# Altium PCB demo.PcbDoc
Units mm, origin at the board's own origin, x right, y up, seen from the top; angles counter-clockwise.
Board outline 100 x 100 mm, 2 copper layers (Top Layer, Bottom Layer); 59 components, 69 nets, 272 pads, 0 vias.
Unrouted connection lines stored in the file: 188.
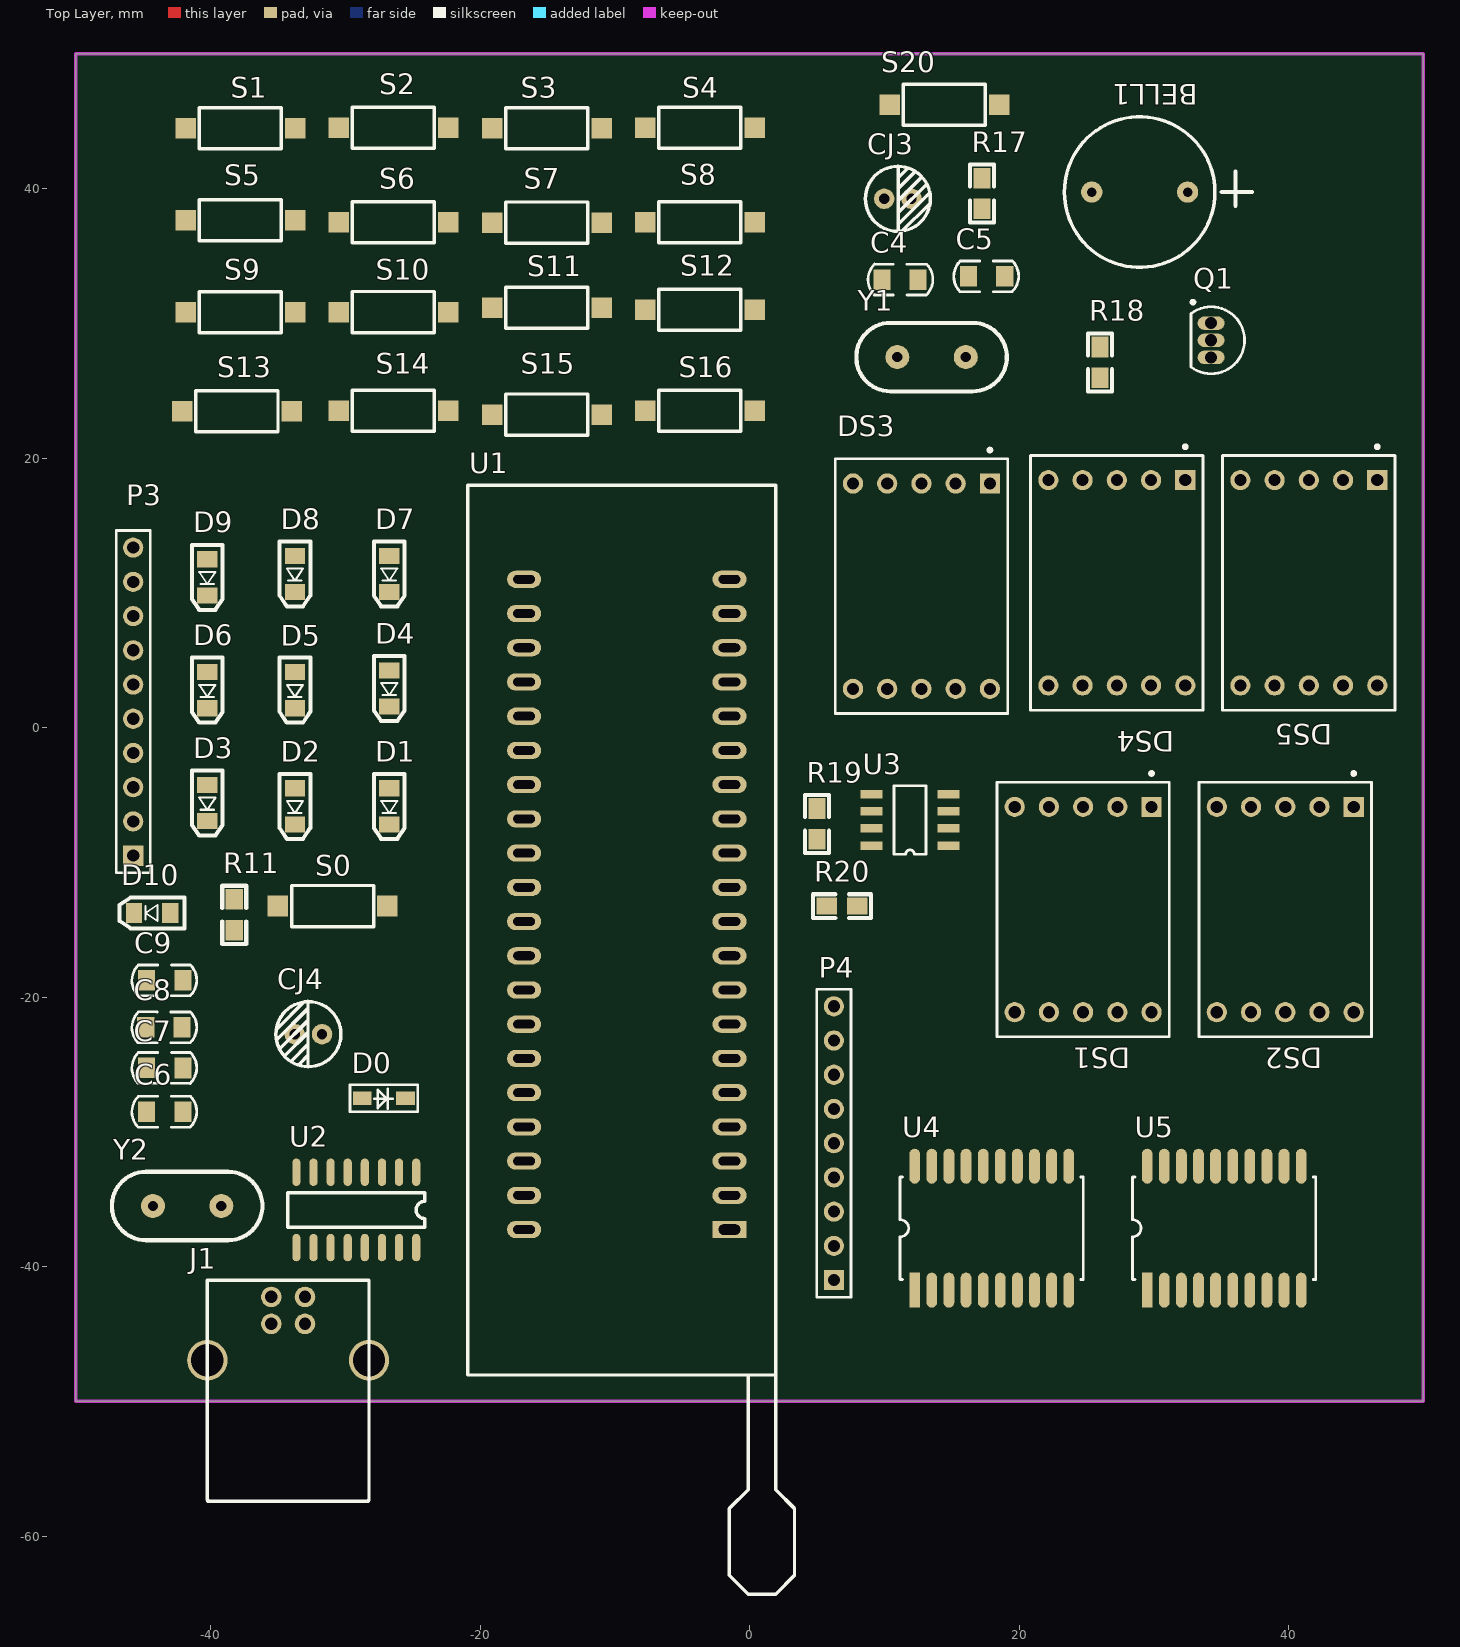
[diagram p0: Top Layer view]
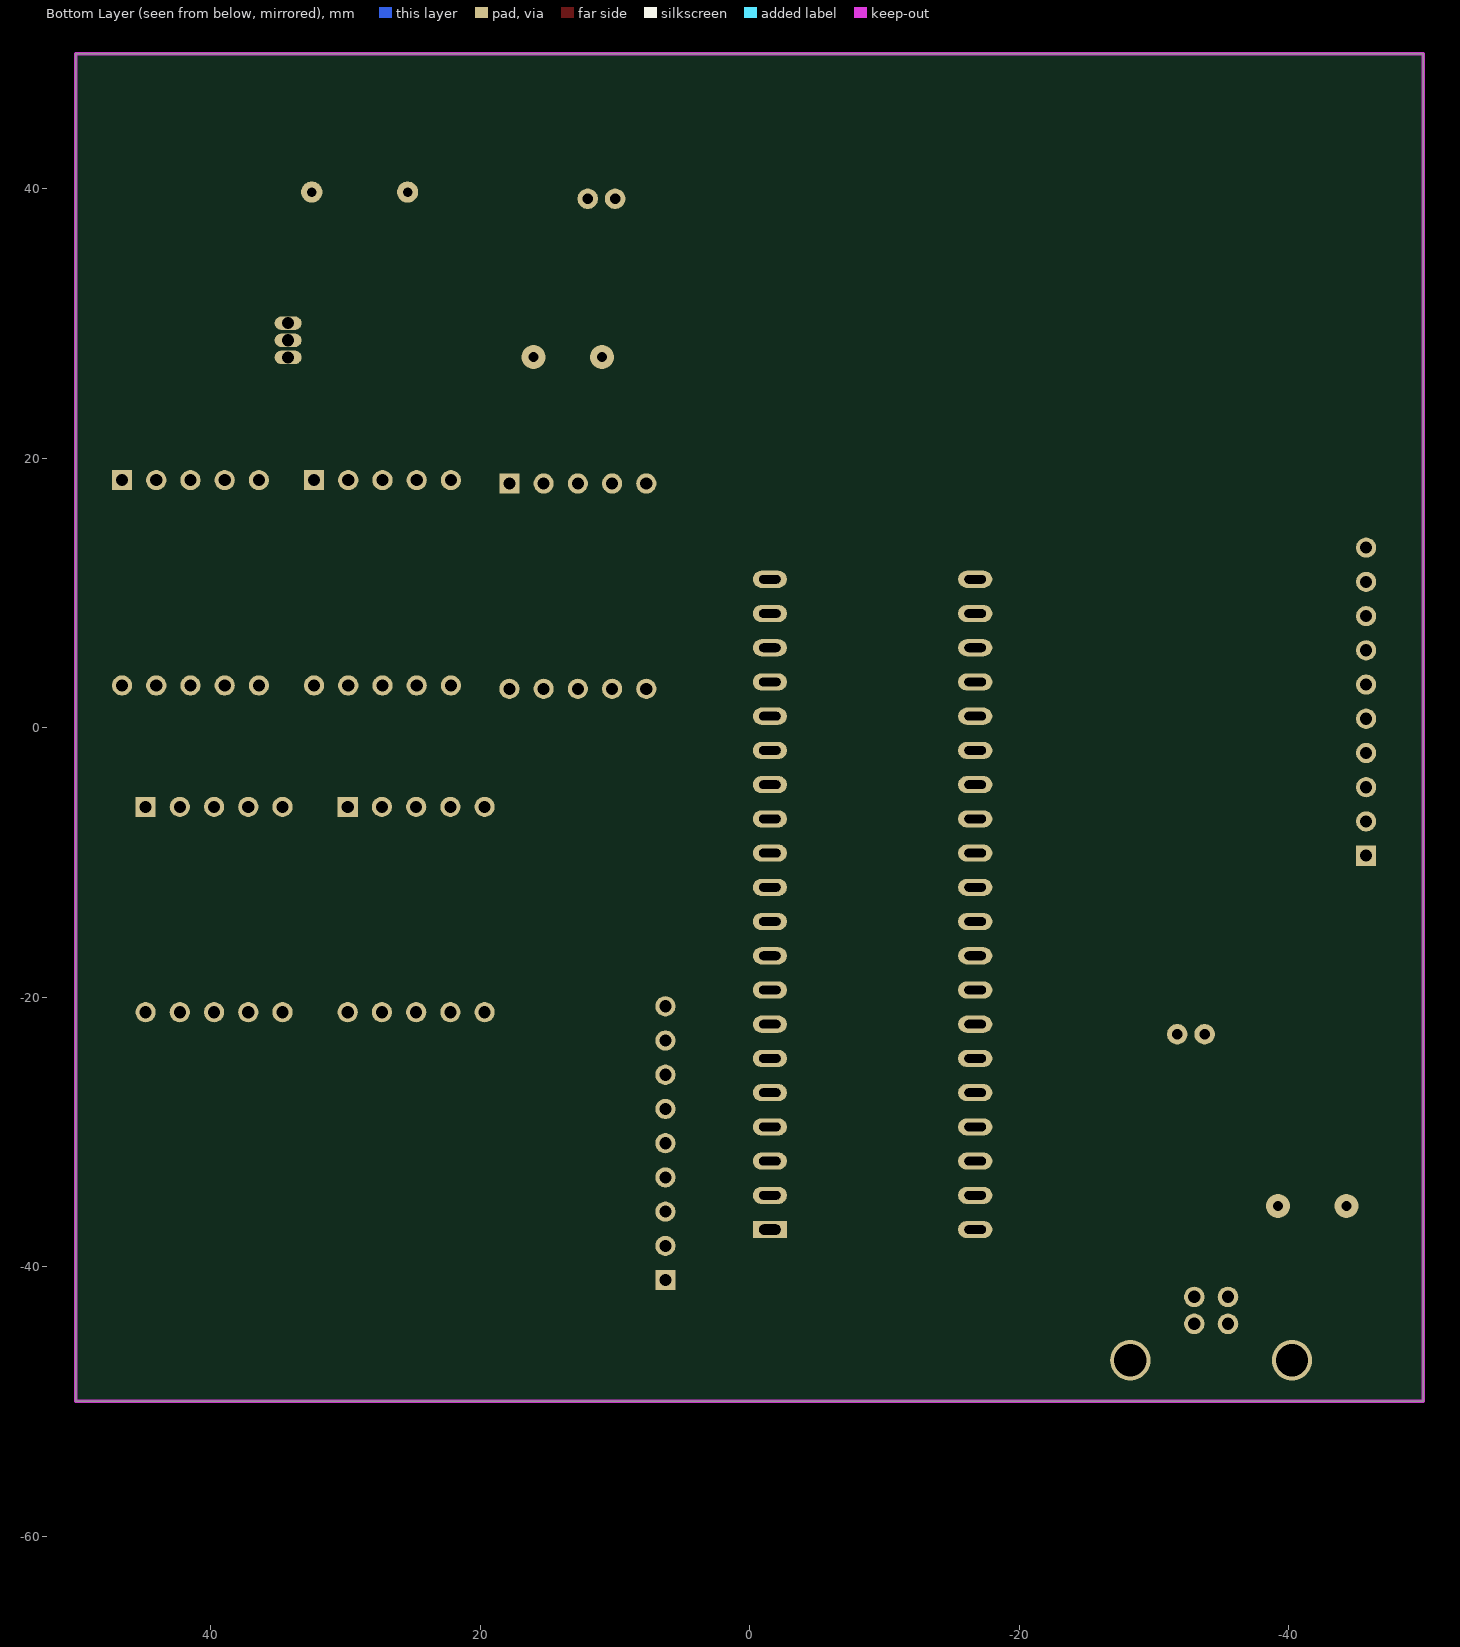
[diagram p1: Bottom Layer view, seen from below]

## Layer stack, top to bottom
Top Layer: signal copper 0.0356
Dielectric: dielectric 0.32, FR-4, Dk 4.8
Bottom Layer: signal copper 0.0356

## Board outline
-50,-50 50,-50 50,50 -50,50

## Design rules (kind name [scope] priority, off if disabled: settings)
Clearance [All] p1: gap=0.254
PolygonConnect [All] p1: connectstyle=Relief reliefconductorwidth=0.254 reliefentries=4 polygonreliefangle="90 Angle" airgapwidth=0.254
RoutingVias [All] p1: holewidth=0.711 width=1.27 viastyle="Through Hole" minholewidth=0.711 minwidth=1.27 maxholewidth=0.711 maxwidth=1.27
SolderMaskExpansion [All] p1: expansion=0.102
Width VCC [InNet('VCC')] p1: maxlimit=2 minlimit=0.254 preferedwidth=0.8
Width +5 [InNet('+5V')] p2: maxlimit=2 minlimit=0.254 preferedwidth=0.8
Width [All] p3: maxlimit=0.254 minlimit=0.254 preferedwidth=0.254
28 further rules are at their usual default settings.

## Components (designator, comment, footprint, x,y, rotation, side; value= is the part's Value field where it differs from the comment)
BELL1 "BELL" BELL 32.5,39.75 r0 top
C4 "Cap" 0805C 12.5,33.25 r180 top
C5 "Cap" 0805C 16.25,33.5 r0 top
C6 "Cap" 0805C -44.75,-28.5 r0 top
C7 "Cap" 0805C -44.75,-25.25 r0 top
C8 "0.01UF" 0805C -42.135,-22.25 r180 top
C9 "0.1UF" 0805C -44.75,-18.75 r0 top
CJ3 "" RB10U 11,39.25 r0 top
CJ4 "" RB10U -32.75,-22.75 r180 top
D0 "Diode 1N4148" SOD123F -28.75,-27.5 r0 top
D1 "LED0" 0805-LED -26.75,-4.5 r90 top
D2 "LED0" 0805-LED -33.75,-4.5 r90 top
D3 "LED0" 0805-LED -40.25,-4.25 r90 top
D4 "LED0" 0805-LED -26.75,4.25 r90 top
D5 "LED0" 0805-LED -33.75,4.125 r90 top
D6 "LED0" 0805-LED -40.25,4.125 r90 top
D7 "LED0" 0805-LED -26.75,12.75 r90 top
D8 "LED0" 0805-LED -33.75,12.75 r90 top
D9 "LED0" 0805-LED -40.25,12.5 r90 top
D10 "LED0" 0805-LED -43,-13.75 r0 top
DS1 "Dpy Blue-CA" H 24.75,-13.5 r180 top
DS2 "Dpy Blue-CA" H 39.75,-13.5 r180 top
DS3 "Dpy Blue-CA" H 12.75,10.5 r180 top
DS4 "Dpy Blue-CA" H 27.25,10.75 r180 top
DS5 "Dpy Blue-CA" H 41.5,10.75 r180 top
J1 "USB" USB-B -33,-42.25 r90 top
P3 "1k" HDR1X10 -45.75,-9.5 r90 top
P4 "10K" HDR1X9 6.25,-41 r90 top
Q1 "2N3906" TO-92A 34.25,28.75 r180 top
R11 "Res2" 0805 -38.25,-12.75 r270 top
R17 "Res2" 0805 17.25,38.5 r90 top
R18 "Res2" 0805 26,28.25 r270 top
R19 "10K" 0805 5,-6 r270 top
R20 "10K" 0805 8,-13.25 r180 top
S0 "SW-SPST" SWD -35,-13.25 r0 top
S1 "" SWD -33.75,44.5 r180 top
S2 "" SWD -30.5,44.5 r0 top
S3 "" SWD -11,44.5 r180 top
S4 "" SWD -7.75,44.5 r0 top
S5 "" SWD -33.75,37.667 r180 top
S6 "" SWD -30.5,37.5 r0 top
S7 "" SWD -11,37.5 r180 top
S8 "" SWD -7.75,37.5 r0 top
S9 "" SWD -33.75,30.833 r180 top
S10 "" SWD -30.5,30.833 r0 top
S11 "" SWD -11,31.167 r180 top
S12 "" SWD -7.75,31 r0 top
S13 "" SWD -34,23.5 r180 top
S14 "" SWD -30.5,23.5 r0 top
S15 "" SWD -11,23.25 r180 top
S16 "" SWD -7.75,23.5 r0 top
S20 "" SWD 18.5,46.25 r180 top
U1 "AT89C51" DIP40紧锁座 -1.5,-37.25 r180 top
U2 "CH340G" SO-16 -24.75,-33 r270 top
U3 "24C02" SOP-8 14.75,-8.75 r180 top
U4 "74573" SO20W 12.25,-41.75 r90 top
U5 "74573" SO20W 29.5,-41.75 r90 top
Y1 "11.0592MHZ" XTAL 13.5,27.5 r180 top
Y2 "12MHZ" XTAL -41.75,-35.5 r0 top

## Footprints (in the part's own frame and the unit in brackets; to place one, negate y for a bottom-side part, rotate by r counter-clockwise, add the part's x,y. Pads: shape width x height; smd on the part's side, far side on the other; paste and mask are expansions set on the pad)
0805 [mil]
  rect 60x50 smd: 1(0,0) 2(90,0)
  silkscreen extent -40,-35 130,35
0805-LED [mm]
  rect 1.2x1.5 smd: 1(0,0) 2(-2.686,0)
  silkscreen extent -3.76,-1.14 1.07,1.14
0805C [mil]
  rect 50x60 smd: 1(0,0) 2(105.71,-0.32)
  silkscreen extent -43,-45 146,45
BELL [mil]
  round 62 hole 28: 1(0,0) 2(-280,0)
  silkscreen extent -360,-220 188,220
DIP40紧锁座 [mil]
  rect 100x50 hole 30 slot 62.99 at 0 deg: 1(0,0)
  oval 100x50 hole 25 slot 62.99 at 0 deg: 2(0,-100) 3(0,-200) 4(0,-300) 5(0,-400) 6(0,-500) 7(0,-600) 8(0,-700) 9(0,-800) 10(0,-900) 11(0,-1000) 12(0,-1100) 13(0,-1200) 14(0,-1300) 15(0,-1400) 16(0,-1500) 17(0,-1600) 18(0,-1700) 19(0,-1800) 20(0,-1900) 21(600,-1900) 22(600,-1800) 23(600,-1700) 24(600,-1600) 25(600,-1500) 26(600,-1400) 27(600,-1300) 28(600,-1200) 29(600,-1100) 30(600,-1000) 31(600,-900) 32(600,-800) 33(600,-700) 34(600,-600) 35(600,-500) 36(600,-400) 37(600,-300) 38(600,-200) 39(600,-100) 40(600,0)
  silkscreen extent -190,-2175 765,1065
H [mm] "LED, 7-Segment Display, 14.2 mm, RHD; 10 Leads; Row Space 15.24 mm; Pitch 2.54 mm"
  rect 1.5x1.5 hole 0.9: 1(-5.08,-7.62)
  round 1.5 hole 0.9: 2(-2.54,-7.62) 3(0,-7.62) 4(2.54,-7.62) 5(5.08,-7.62) 6(5.08,7.62) 7(2.54,7.62) 8(0,7.62) 9(-2.54,7.62) 10(-5.08,7.62)
  silkscreen extent -6.4,-10.22 6.4,9.45, body extent -6.4,-9.45 6.4,9.45, height 8.25
HDR1X9 [mm] "Connector; Header; 9 Position"
  rect 1.5x1.5 hole 0.9: 1(0,0)
  round 1.5 hole 0.9: 2(2.54,0) 3(5.08,0) 4(7.62,0) 5(10.16,0) 6(12.7,0) 7(15.24,0) 8(17.78,0) 9(20.32,0)
  silkscreen extent -1.27,-1.27 21.59,1.27
HDR1X10 [mm] "Connector; Header; 10 Position"
  rect 1.5x1.5 hole 0.9: 1(0,0)
  round 1.5 hole 0.9: 2(2.54,0) 3(5.08,0) 4(7.62,0) 5(10.16,0) 6(12.7,0) 7(15.24,0) 8(17.78,0) 9(20.32,0) 10(22.86,0)
  silkscreen extent -1.27,-1.27 24.13,1.27
RB10U [mil]
  round 60 hole 30: 1(-40,0) 2(40,0)
  silkscreen extent -95,-96 95,95
SO20W [mm]
  rect 2.6x0.8 smd: 1(0,0)
  oval 2.6x0.8 smd: 2(0,-1.27) 3(0,-2.54) 4(0,-3.81) 5(0,-5.08) 6(0,-6.35) 7(0,-7.62) 8(0,-8.89) 9(0,-10.16) 10(0,-11.43) 11(9.2,-11.43) 12(9.2,-10.16) 13(9.2,-8.89) 14(9.2,-7.62) 15(9.2,-6.35) 16(9.2,-5.08) 17(9.2,-3.81) 18(9.2,-2.54) 19(9.2,-1.27) 20(9.2,0)
  silkscreen extent 0.8,-12.51 8.4,1.09
SO-16 [mil]
  oval 80x24 smd: 1(0,0) 2(0,-50) 3(0,-100) 4(0,-150) 5(0,-200) 6(0,-250) 7(0,-300) 8(0,-350) 9(220,-350) 10(220,-300) 11(220,-250) 12(220,-200) 13(220,-150) 14(220,-100) 15(220,-50) 16(220,0)
  silkscreen extent 60,-375 160,25
SOD123F [mm]
  rect 1.4x1 smd: 1(0,0) 2(3.2,0)
  silkscreen extent -0.91,-1 4.11,1
SOP-8 [mil]
  rect 65x25 smd: 1(0,0) 2(0,-50) 3(0,-100) 4(0,-150) 5(224.41,-150) 6(224.41,-100) 7(224.41,-50) 8(224.41,0)
  silkscreen extent 65,-175 159,25
SWD [mil]
  rect 60x60 smd: 1(-0.4,0.5) 2(319.6,0.5)
  silkscreen extent 40,-60 280,61
TO-92A [mm] "TO, Flat Index; 3 In-Line, Axial Leads; Body Dia. 4.5mm; Leads 0.51 x 0.48 mm (max)"
  oval 2x1 hole 0.9: 1(0,-1.27) 2(0,0) 3(0,1.27)
  silkscreen extent -2.48,-2.95 1.5,2.48, body extent -2.5,-2.5 1.5,2.5, height 6.86
USB-B [mm]
  round 1.524 hole 0.92: 1(0,0) 2(0,2.5) 3(-2,2.5) 4(-2,0)
  round 3 hole 2.4: 5(-4.7,7.25) 6(-4.7,-4.75)
  silkscreen extent -15.15,-4.75 1.22,7.25
XTAL [mil]
  round 70 hole 30: 1(-100,0) 2(100,0)
  silkscreen extent -220,-100 220,100

## Part data
C4 C5 C6 C7: "Capacitor"
C8 C9: library part Cap, "Capacitor"
CJ3 CJ4: library part "Cap Pol1", "Polarized Capacitor (Radial)"
D0: "High Conductance Fast Diode"
D1 D2 D3 D4 D5 D6 D7 D8 D9 D10: "Typical INFRARED GaAs LED"
DS1 DS2 DS3 DS4 DS5: "14.2 mm General Purpose Blue 7-Segment Display: CA, RH DP, Gray Surface"
P3: library part "Header 10", "Header, 10-Pin"
P4: library part "Header 9", "Header, 9-Pin"
Q1: "PNP General Purpose Amplifier"
R11 R17 R18: "Resistor"
R19 R20: library part Res2, "Resistor"
S0: "Single-Pole, Single-Throw Switch"
S1 S2 S3 S4 S5 S6 S7 S8 S9 S10 S11 S12 S13 S14 S15 S16 S20: library part SW-PB, "Switch"
U2: "USB2UART"
Y1 Y2: library part XTAL, "Crystal Oscillator"

## Nets (pads, with @x,y where several pads share a name; then routed paths per layer and width w, separated by ;. In a path a pad name is that pad's centre, name@x,y a point inside that pad or via, vN(x,y) a via of type N, cw(c..) or ccw(c..) an arc to the next point about the centre after c; other vN are vias at no path point)
+5V: C9.2 CJ4.1 J1.1 S0.2 U2.16
A: DS1.7 DS2.7 DS3.7 DS4.7 DS5.7 U4.19
B: DS1.6 DS2.6 DS3.6 DS4.6 DS5.6 U4.18
C: DS1.4 DS2.4 DS3.4 DS4.4 DS5.4 U4.17
CH_D+: J1.3 U2.5
CH_D-: J1.2 U2.6
CH_TXD: D0.2 U2.2
D: DS1.2 DS2.2 DS3.2 DS4.2 DS5.2 U4.16
DP: DS1.5 DS2.5 DS3.5 DS4.5 DS5.5 U4.12
DS1: DS1.3 DS1.8 U5.19
DS2: DS2.3 DS2.8 U5.18
DS3: DS3.3 DS3.8 U5.17
DS4: DS4.3 DS4.8 U5.16
DS5: DS5.3 DS5.8 U5.15
E: DS1.1 DS2.1 DS3.1 DS4.1 DS5.1 U4.15
F: DS1.9 DS2.9 DS3.9 DS4.9 DS5.9 U4.14
G: DS1.10 DS2.10 DS3.10 DS4.10 DS5.10 U4.13
GND: BELL1.2 C4.1 C5.1 C6.1 C7.1 C8.2 C9.1 CJ4.2 D10.2 J1.4 R17.1 U1.20 U2.1 U3.1 U3.2 U3.3 U3.4 U3.7 U4.1 U4.10 U5.1 U5.10
NetBELL1_1: BELL1.1 Q1.3
NetC6_2: C6.2 U2.8 Y2.2
NetC7_2: C7.2 Y2.1
NetC8_1: C8.1 U2.4
NetD1_1: D1.1 P3.2
NetD2_1: D2.1 P3.3
NetD3_1: D3.1 P3.4
NetD4_1: D4.1 P3.5
NetD5_1: D5.1 P3.6
NetD6_1: D6.1 P3.7
NetD7_1: D7.1 P3.8
NetD8_1: D8.1 P3.9
NetD9_1: D9.1 P3.10
NetD10_1: D10.1 R11.2
NetQ1_2: Q1.2 R18.1
P0.0: D1.2 U1.39
P0.1: D2.2 U1.38
P0.2: D3.2 U1.37
P0.3: D4.2 U1.36
P0.4: D5.2 U1.35
P0.5: D6.2 U1.34
P0.6: D7.2 U1.33
P0.7: D8.2 U1.32
P1.0: P4.2 U1.1 U4.2 U5.2
P1.1: P4.3 U1.2 U4.3 U5.3
P1.2: P4.4 U1.3 U4.4 U5.4
P1.3: P4.5 U1.4 U4.5 U5.5
P1.4: P4.6 U1.5 U4.6 U5.6
P1.5: P4.7 U1.6 U4.7 U5.7
P1.6: P4.8 U1.7 U4.8 U5.8
P1.7: P4.9 U1.8 U4.9 U5.9
P2.0: S1.1 S2.1 S3.1 S4.1 U1.21
P2.1: S5.1 S6.1 S7.1 S8.1 U1.22
P2.2: S9.1 S10.1 S11.1 S12.1 U1.23
P2.3: S13.1 S14.1 S15.1 S16.1 U1.24
P2.4: S1.2 S5.2 S9.2 S13.2 U1.25
P2.5: S2.2 S6.2 S10.2 S14.2 U1.26
P2.6: S3.2 S7.2 S11.2 S15.2 U1.27
P2.7: S4.2 S8.2 S12.2 S16.2 U1.28
P3.0/RXD: D0.1 U1.10
P3.1/TXD: U1.11 U2.3
P3.2: R18.2 U1.12
P3.3: R19.1 U1.13 U3.6
P3.4: R20.1 U1.14 U3.5
P3.5: D9.2 U1.15
P3.6: U1.16 U4.11
P3.7: U1.17 U5.11
RST: CJ3.2 R17.2 S20.1 U1.9
VCC: CJ3.1 P3.1 P4.1 Q1.1 R11.1 R19.2 R20.2 S0.1 S20.2 U1.31 U1.40 U3.8 U4.20 U5.20
XTAL1: C4.2 U1.19 Y1.2
XTAL2: C5.2 U1.18 Y1.1
pads on no net: J1.5 J1.6 U1.29 U1.30 U2.7 U2.9 U2.10 U2.11 U2.12 U2.13 U2.14 U2.15 U5.12 U5.13 U5.14

## Keep-outs
Keep-Out Layer:
  the board outline again, w0.254